# Altium PCB jlinker.PcbDoc
Units mm, origin at the board's own origin, x right, y up, seen from the top; angles counter-clockwise.
Board outline 14.4 x 12.04 mm, 2 copper layers (Top Layer, Bottom Layer); 2 components, 8 nets, 15 pads, 16 vias.
Unrouted connection lines stored in the file: 16.
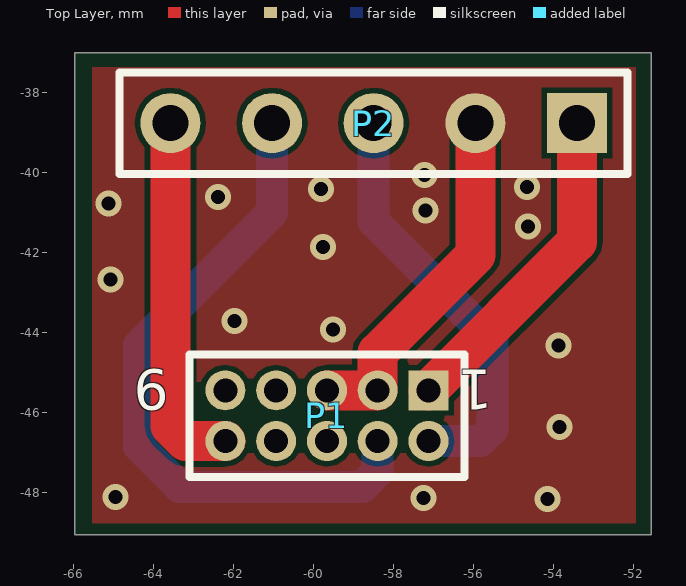
[diagram p0: Top Layer view]
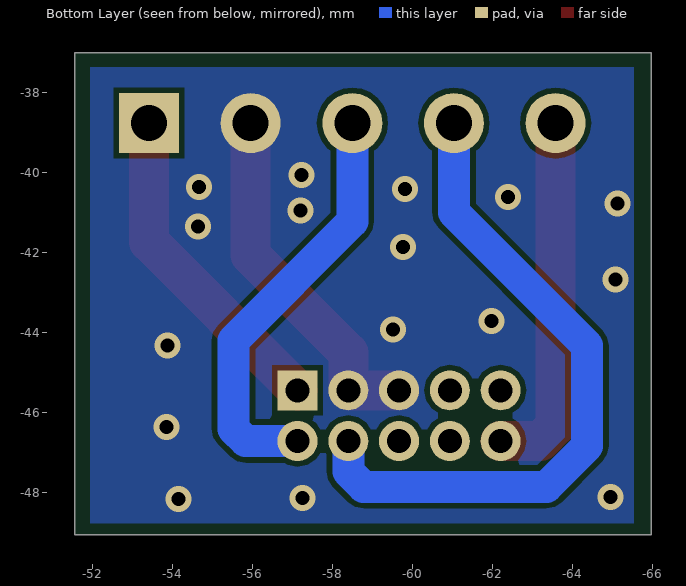
[diagram p1: Bottom Layer view, seen from below]

## Layer stack, top to bottom
Top Solder: solder mask 0.0102, Solder Resist, Dk 3.5
Top Layer: signal copper 0.0356
Dielectric 1: dielectric 0.32, FR-4, Dk 4.8
Bottom Layer: signal copper 0.0356
Bottom Solder: solder mask 0.0102, Solder Resist, Dk 3.5

## Board outline
-65.964,-49.047 -51.562,-49.047 -51.562,-37.008 -65.964,-37.008

## Design rules (kind name [scope] priority, off if disabled: settings)
Clearance [All] p1: gap=0.13 ignorepadtopadclearanceinfootprint=FALSE
HoleToHoleClearance [All] p1: gap=0 allowstackedmicrovias=TRUE
MinimumSolderMaskSliver [All] p1: minsoldermaskwidth=0
PlaneConnect [All] p1: planeconnectstyle=Direct reliefexpansion=0.508 reliefentries=4 reliefconductorwidth=0.254 reliefairgap=0.254
PolygonConnect [All] p1: connectstyle=Direct reliefconductorwidth=0.254 reliefentries=4 polygonreliefangle="90 Angle" airgapwidth=0.254
RoutingVias [All] p1: holewidth=0.3 width=0.6 viastyle="Through Hole" minholewidth=0.3 minwidth=0.6 maxholewidth=0.6 maxwidth=1.27
SilkToSilkClearance [All] p1: silktosilkclearance=0
SilkToSolderMaskClearance [IsPad] p1: minsilkscreentomaskgap=0 clearancetoexposedcopper=TRUE
SolderMaskExpansion [All] p1: expansion=0.102 istentingtop=FALSE
Width [All] p1: maxlimit=1 minlimit=0.254 preferedwidth=0.35
25 further rules are at their usual default settings.

## Components (designator, comment, footprint, x,y, rotation, side; value= is the part's Value field where it differs from the comment)
P1 "Header 5X2H" MHDR2X5 -57.125,-45.441 r180 top
P2 "Header 5H" HDR1X5 -53.416,-38.76 r180 top

## Footprints (in the part's own frame and the unit in brackets; to place one, negate y for a bottom-side part, rotate by r counter-clockwise, add the part's x,y. Pads: shape width x height; smd on the part's side, far side on the other; paste and mask are expansions set on the pad)
HDR1X5 [mm] "Connector; Header; 5 Position"
  rect 1.5x1.5 hole 0.9: 1(0,0)
  round 1.5 hole 0.9: 2(2.54,0) 3(5.08,0) 4(7.62,0) 5(10.16,0)
  silkscreen extent -1.27,-1.27 11.43,1.27
MHDR2X5 [mm] "Connector; Header; 5x2 Position"
  rect 1x1 hole 0.6: 1(0,0)
  round 1 hole 0.6: 2(0,1.27) 3(1.27,0) 4(1.27,1.27) 5(2.54,0) 6(2.54,1.27) 7(3.81,0) 8(3.81,1.27) 9(5.08,0) 10(5.08,1.27)
  silkscreen extent -0.9,-0.9 5.98,2.17

## Part data
P1: "Header, 5-Pin, Dual row, Right Angle", LatestRevisionDate=17-Jul-2002, LatestRevisionNote="Re-released for DXP Platform.", Publisher="Altium Limited"
P2: "Header, 5-Pin, Right Angle", LatestRevisionDate=17-Jul-2002, LatestRevisionNote="Re-released for DXP Platform.", Publisher="Altium Limited"

## Via types
v1: diameter 0.65, hole 0.35, Top Layer to Bottom Layer, tented both sides, 16 vias

## Nets (pads, with @x,y where several pads share a name; then routed paths per layer and width w, separated by ;. In a path a pad name is that pad's centre, name@x,y a point inside that pad or via, vN(x,y) a via of type N, cw(c..) or ccw(c..) an arc to the next point about the centre after c; other vN are vias at no path point)
GND: P1.3 P1.5 P2.2 | length 9
  Top Layer w1: P1.5 P1.3 -58.395,-44.501 -55.956,-42.062 P2.2
  other v1: -54.153,-48.158 -57.252,-48.133 -64.948,-48.108 -53.848,-46.355 -53.873,-44.323 -59.512,-43.917 -61.976,-43.713 -65.075,-42.672 -59.766,-41.859 -54.635,-41.351 -57.201,-40.945 -65.126,-40.767 -62.382,-40.615 -59.817,-40.411 -54.661,-40.361 -57.226,-40.056
nC: P1.9
nRESET: P1.10 P2.5 | length 9.1
  Top Layer w1: P2.5 -63.576,-46.33 -63.195,-46.711 P1.10
SWCLK: P1.4 P2.4 | length 16.8
  Bottom Layer w0.8: P2.4 -61.036,-40.996 -64.364,-44.323 -64.364,-46.838 -63.348,-47.854 -58.776,-47.854 -58.395,-47.473 P1.4
SWDIO: P1.2 P2.3 | length 10.6
  Bottom Layer w0.8: P2.3 -58.496,-41.224 -55.524,-44.196 -55.524,-46.406 -55.829,-46.711 P1.2
SWO: P1.6
TDI: P1.8
Vref: P1.1 P2.1 | length 8.2
  Top Layer w1: P1.1 -53.416,-41.732 P2.1
pads on no net: P1.7

## Polygon pours and split planes (outlines as drawn)
GND on Top Layer "Top Layer-GND 2" (solid, remove dead copper, pour order 0): -65.71,-48.946 -65.71,-37.186 -51.765,-37.186 -51.765,-48.946
GND on Bottom Layer "Bottom Layer-GND" (solid, remove dead copper, pour order 2): -65.71,-48.946 -65.71,-37.186 -51.765,-37.186 -51.765,-48.946

## Silkscreen, mask and mechanical layers (free items; w line width, h text height)
Mechanical 1:
  lines w0.01: -65.964,-49.047 -65.964,-37.008 -65.329,-37.008 -51.562,-37.008 -51.562,-49.047 -65.964,-49.047

## Text inside footprints (layer, text, board x,y; h text height)
P1: Top Overlay "1" at -55.525,-44.933 h1 r180; Top Overlay "9" at -63.625,-44.933 h1 r180